# Altium PCB MAGI'sCore-MBH.PcbDoc
Units mil, origin at the board's own origin, x right, y up, seen from the top; angles counter-clockwise.
Board outline 6000 x 4000 mil, 2 copper layers (Top Layer, Bottom Layer); 12 components, 31 nets, 75 pads, 16 vias.
Unrouted connection lines stored in the file: 1.
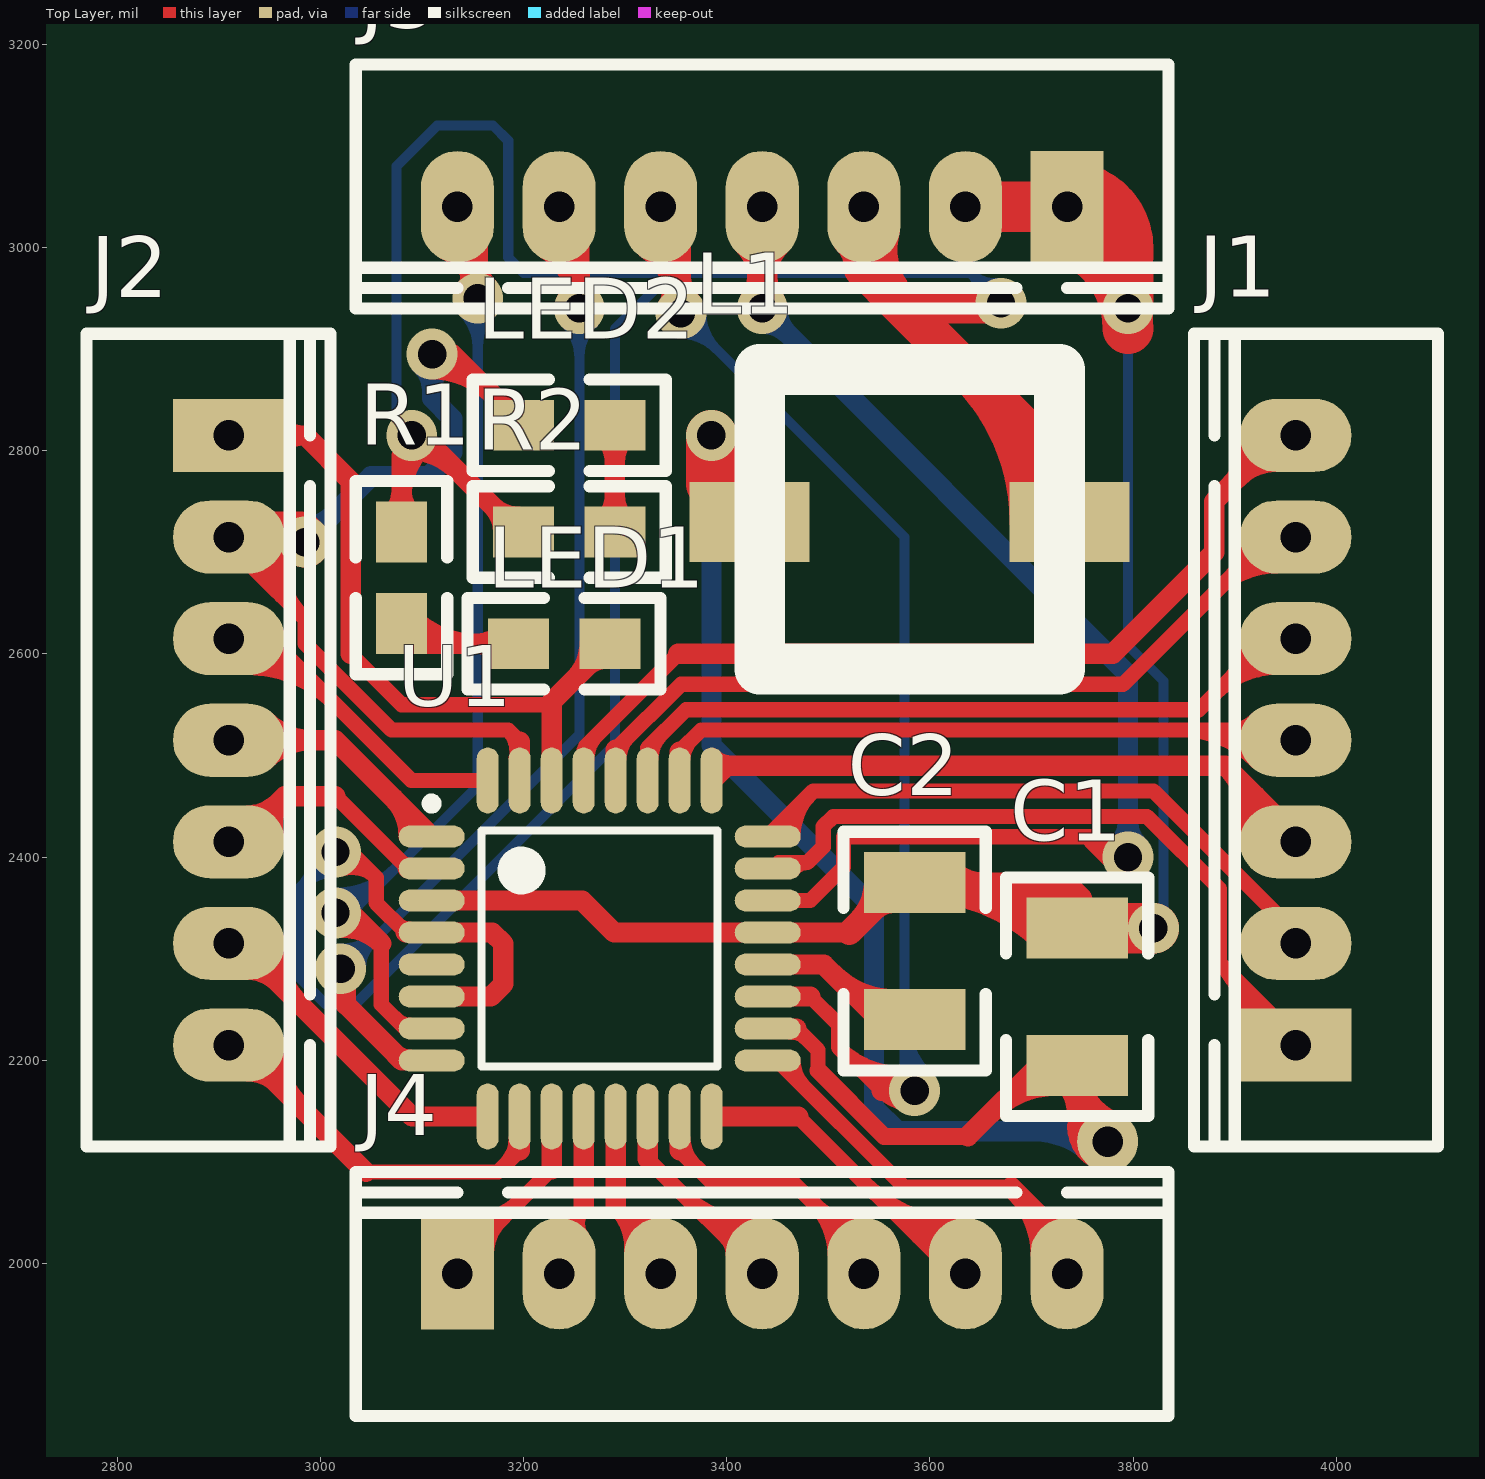
[diagram p0: Top Layer view]
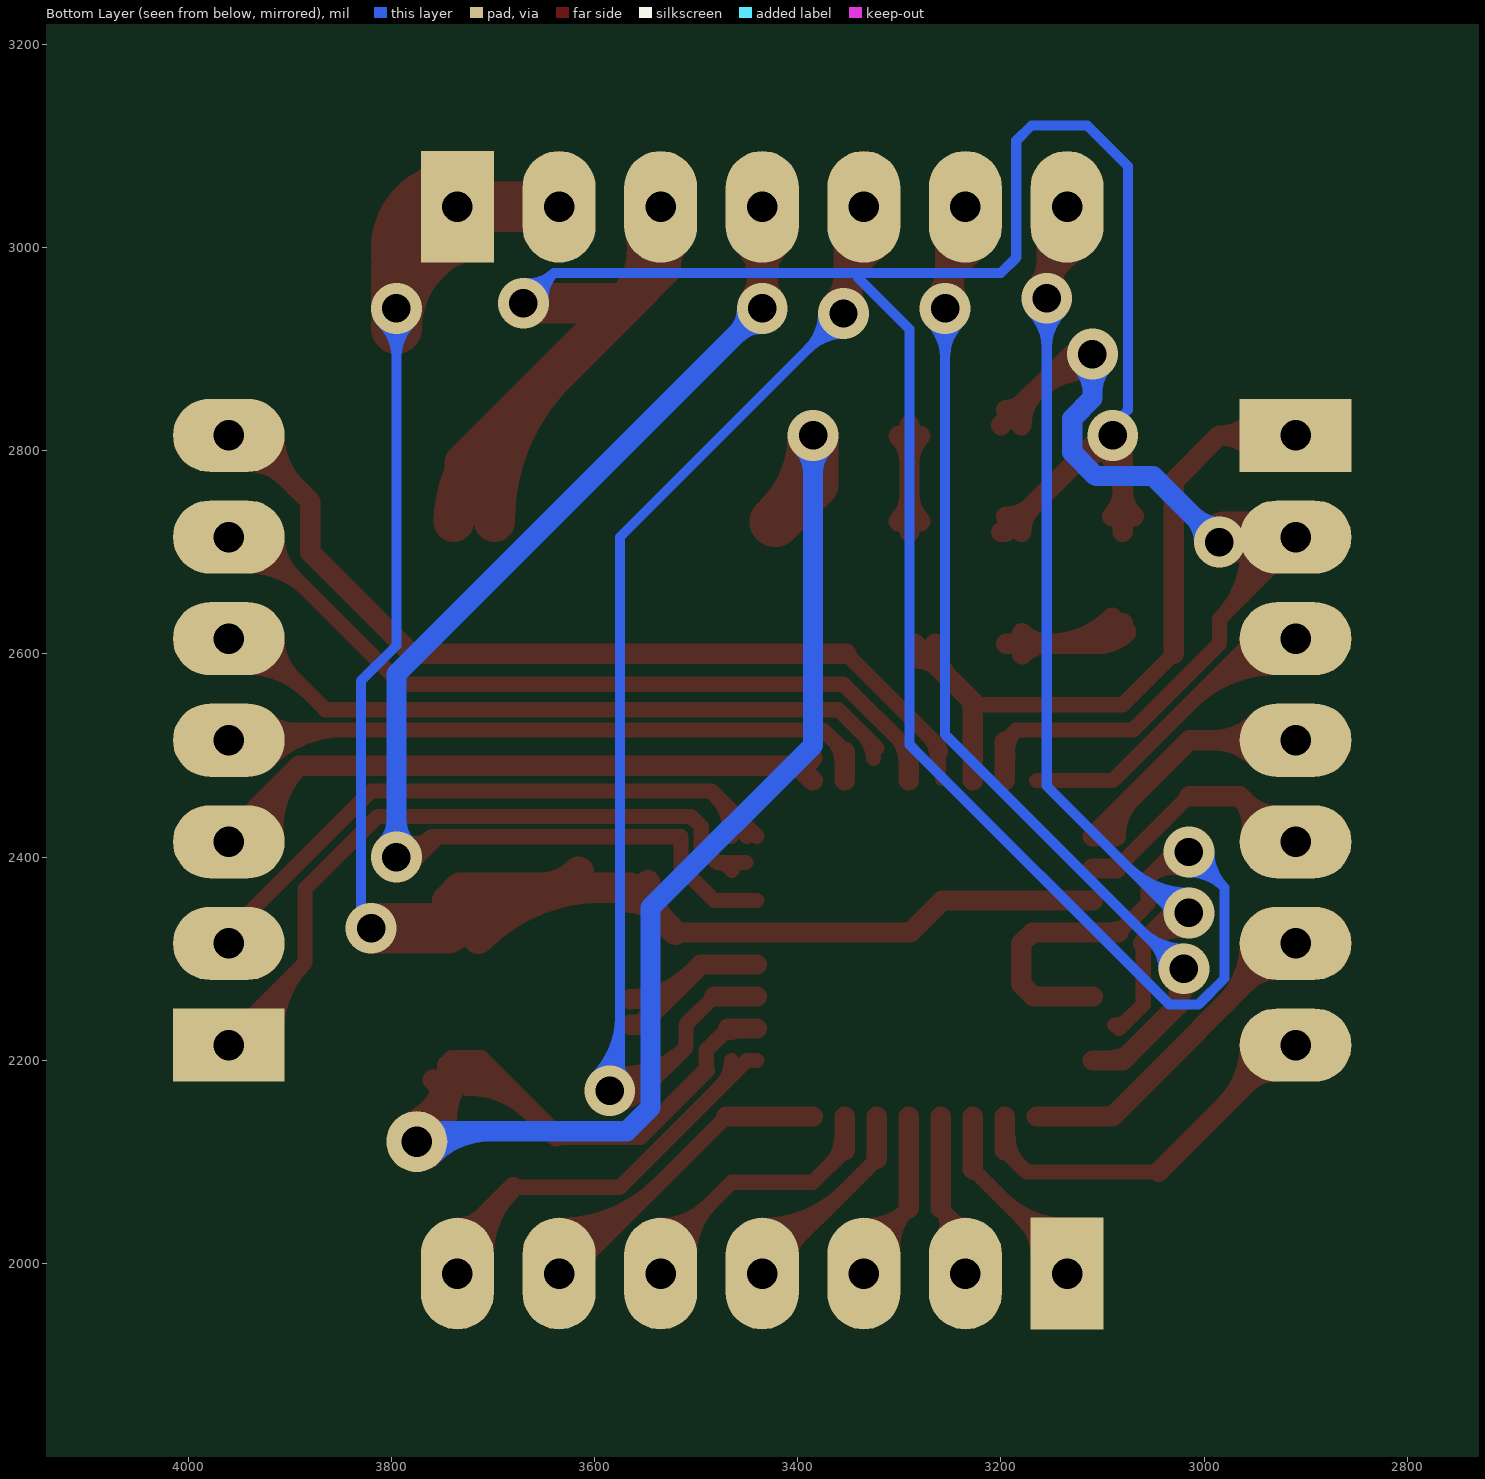
[diagram p1: Bottom Layer view, seen from below]

## Layer stack, top to bottom
Top Layer: signal copper 1.4
Dielectric: dielectric 12.6, FR-4, Dk 4.8
Bottom Layer: signal copper 1.4

## Board outline
1000,1000 7000,1000 7000,5000 1000,5000

## Design rules (kind name [scope] priority, off if disabled: settings)
Clearance [All] p1: gap=5
ComponentClearance [All] p1: gap=0 collisioncheckmode=3 verticalgap=0 showdistances=FALSE
PolygonConnect [All] p1: connectstyle=Relief reliefconductorwidth=10 reliefentries=4 polygonreliefangle="90 Angle" airgapwidth=10
RoutingVias [All] p1: holewidth=28 width=50 viastyle="Through Hole" minholewidth=28 minwidth=50 maxholewidth=28 maxwidth=50
SilkToSilkClearance [All] p1: silktosilkclearance=0
SolderMaskExpansion [All] p1: expansion=4
Width [All] p1: maxlimit=100 minlimit=10 preferedwidth=10
26 further rules are at their usual default settings.

## Components (designator, comment, footprint, x,y, rotation, side; value= is the part's Value field where it differs from the comment)
C1 "CAP_1" 1210 3745,2330 r270 top
C2 "CAP_1" 1210 3585,2375 r270 top
J1 "CON7" CON7 3960,2215 r90 top
J2 "CON7" CON7 2910,2815 r270 top
J3 "CON7" CON7 3735,3040 r180 top
J4 "CON7" CON7 3135,1990 r0 top
L1 "INDUCTOR" 22uh 3580,2730 r0 top
LED1 "LED_3" 0805 3195,2610 r0 top
LED2 "LED_3" 0805 3290,2825 r180 top
R1 "RES1_1" 0805 3080,2630 r90 top
R2 "RES1_1" 0805 3290,2720 r180 top
U1 "ATmega8A-AU" 32A_N 3275,2310 r0 top

## Footprints (in the part's own frame and the unit in brackets; to place one, negate y for a bottom-side part, rotate by r counter-clockwise, add the part's x,y. Pads: shape width x height; smd on the part's side, far side on the other; paste and mask are expansions set on the pad)
22uh [mm]
  rect 3x2 smd: 1(-4,0) 2(4,0)
  silkscreen extent -3.75,-3.68 3.75,3.81
32A_N [mm] "32-Pin Thin Quad Flat Pack 0.8 mm Pitch, IPC Medium Density"
  oval 1.65x0.55 smd: 1(-4.2,2.8) 2(-4.2,2) 3(-4.2,1.2) 4(-4.2,0.4) 5(-4.2,-0.4) 6(-4.2,-1.2) 7(-4.2,-2) 8(-4.2,-2.8) 17(4.2,-2.8) 18(4.2,-2) 19(4.2,-1.2) 20(4.2,-0.4) 21(4.2,0.4) 22(4.2,1.2) 23(4.2,2) 24(4.2,2.8)
  oval 0.55x1.65 smd: 9(-2.8,-4.2) 10(-2,-4.2) 11(-1.2,-4.2) 12(-0.4,-4.2) 13(0.4,-4.2) 14(1.2,-4.2) 15(2,-4.2) 16(2.8,-4.2) 25(2.8,4.2) 26(2,4.2) 27(1.2,4.2) 28(0.4,4.2) 29(-0.4,4.2) 30(-1.2,4.2) 31(-2,4.2) 32(-2.8,4.2)
  silkscreen extent -4.32,-2.95 2.95,3.75, body extent -3.5,-3.5 3.5,3.5, height 1.2
0805 [mil]
  rect 60x50 smd: 1(0,0) 2(90,0)
  silkscreen extent -50,-45 140,45
1210 [mil]
  rect 60x100 smd: 1(0,0) 2(135,0)
  silkscreen extent -50,-70 185,70
CON7 [mil]
  rect 72x110 hole 30: 1(0,0)
  oval 72x110 hole 30: 2(100,0) 3(200,0) 4(300,0) 5(400,0) 6(500,0) 7(600,0)
  silkscreen extent -100,-140 700,100

## Part data
C1 C2: "Capacitor"
J1 J2 J3 J4: "Connector"
U1: "8-bit AVR Microcontroller, 8KB Flash, 512 Bytes EEPROM, 1KB SRAM, 32-pin TQFP, Industrial Grade (-40癈 to 85癈)"

## Free pads (board coordinates)
  round 60 hole 30: 0(3775,2120)

## Via types
v1: diameter 50, hole 28, Top Layer to Bottom Layer, 16 vias

## Nets (pads, with @x,y where several pads share a name; then routed paths per layer and width w, separated by ;. In a path a pad name is that pad's centre, name@x,y a point inside that pad or via, vN(x,y) a via of type N, cw(c..) or ccw(c..) an arc to the next point about the centre after c; other vN are vias at no path point)
ADC6: J3.5 U1.19 | length 1852.5
  Top Layer w15: 3482.24,2262.76 3510,2235 3510,2212.72 ; 3531.9,2190.82 ccw(c3577.23,2236.16) v1@3584.71,2172.48 ; 3552.72,2170 3510,2212.72 ; 3553.79,2168.93 ccw(c3581.83,2196.97) v1@3586.46,2157.59 ; v1@3582.96,2187.38 cw(c3572.63,2275.35) 3510,2212.72
  Top Layer w20: J3.5@3320.1,2999.69 cw(c3273.27,2932.71) v1@3355,2932.71 ; J3.5@3331.56,3016.08 cw(c3300.11,2971.1) 3355,2971.1 ; v1@3342.01,2942.5 ccw(c3312.4,2959.59) 3345.42,2968.44 ; v1@3344.39,2945.61 ccw(c3318.79,2971.21) 3355,2971.21 ccw(c3391.21,2971.21) v1@3365.61,2945.61 ; 3344.68,2971.21 ccw(c3381.62,2981.11) v1@3362.5,2947.99 ; v1(3355,2935) J3.5@3355,3060 ; U1.19 3482.24,2262.76 ; v1@3565,2170 3552.72,2170 ; v1@3573.53,2160.33 ccw(c3552.72,2142.77) 3552.72,2170 ; v1@3573.53,2179.67 cw(c3552.72,2197.23) 3552.72,2170
  Bottom Layer w10: v1@3355,2915 cw(c3355,2866.72) 3389.14,2900.86 cw(c3423.28,2935) v1@3375,2935 ; v1(3355,2935) 3575,2715 v1@3575,2165 ; v1@3570.86,2184.14 ccw(c3560.86,2194.14) 3575,2194.14 ccw(c3609.14,2194.14) v1(3585,2170) ; 3575,2218.28 ccw(c3633.28,2218.28) v1@3592.07,2177.07 ; 3575,2242.43 ccw(c3657.43,2242.43) v1@3599.14,2184.14
ADC7: J3.4 U1.22 | length 1596.8
  Top Layer w15: U1.22 3482.24,2357.24 3515,2390 3515,2420 3760,2420 3761.25,2418.75
  Top Layer w20: J3.4@3416.62,3002.62 cw(c3372.23,2958.23) 3435,2958.23 cw(c3497.77,2958.23) J3.4@3453.38,3002.62 ; v1@3422.77,2948.68 ccw(c3390.62,2971.51) 3428.71,2981.72 ; v1@3424.39,2950.61 ccw(c3398.79,2976.21) 3435,2976.21 ccw(c3471.21,2976.21) v1@3445.61,2950.61 ; v1@3427.5,2952.99 ccw(c3417.45,2970.4) 3436.87,2965.2 ; 3433.13,2965.2 ccw(c3452.55,2970.4) v1@3442.5,2952.99 ; v1(3435,2940) J3.4 ; 3441.29,2981.72 ccw(c3479.38,2971.51) v1@3447.23,2948.68 ; v1@3788,2413.27 cw(c3776.87,2434.37) 3760,2417.5 3777.5,2400 v1(3795,2400)
  Bottom Layer w20: v1@3435,2925 cw(c3435,2888.79) 3460.61,2914.39 cw(c3486.21,2940) v1@3450,2940 ; v1(3435,2940) 3795,2580 v1(3795,2400) ; v1@3784.39,2410.61 ccw(c3758.79,2436.21) 3795,2436.21 ccw(c3831.21,2436.21) v1@3805.61,2410.61
GND: C1.1 C2.1 J3.1 J3.2 U1.3 U1.5 U1.21 | length 2550.8
  Top Layer w20: U1.3 3257.76,2357.24 3289.25,2325.75 U1.21 3520.75,2325.75
  Top Layer w25: 3520.75,2325.75 C2.1@3565,2370 ; 3531.59,2336.59 ccw(c3493.18,2375) C2.1@3547.5,2375 ; C2.1@3543.66,2348.66 cw(c3565,2327.32) C2.1@3565,2357.5
  Top Layer w30: C2.1@3565,2370 3732.5,2370 3745,2357.5 C1.1 ; C2.1@3592.22,2370 cw(c3592.22,2197.22) C1.1@3714.39,2319.39 ; C2.1@3615.61,2385.61 ccw(c3653.28,2423.28) 3653.28,2370 ; 3664.64,2370 cw(c3664.64,2269.64) C1.1@3735.61,2340.61
  Top Layer w50: J3.2 J3.1 3795,2980 v1(3795,2940) ccw(c3698.43,2940) J3.1@3766.72,3008.28 ; J3.1@3731.3,3010.64 cw(c3698.95,2920.2) v1@3795,2920.2 ; J3.1@3734.74,3010 cw(c3733.31,2948.33) v1@3795,2948.33 ; J3.1@3735,3010 cw(c3735,2937.57) 3786.21,2988.79 ; J3.1@3735.91,3059.99 cw(c3734.5,2999.51) 3795,2999.51 ; C1.1 v1(3820,2330) ; J3.1@3748.13,3057.72 cw(c3724.34,2991.19) 3795,2991.19
  Bottom Layer w10: v1@3780.86,2925.86 cw(c3746.72,2891.72) 3795,2891.72 cw(c3843.28,2891.72) v1@3809.14,2925.86 ; v1(3795,2940) 3795,2608.28 3830,2573.28 3830,2335 v1@3835,2330
MISO: J4.6 U1.16 | length 555.6
  Top Layer w15: 3470.35,2144.65 J4.6@3625,1990 ; 3536.84,2078.16 ccw(c3635,2176.32) J4.6@3635,2037.5 ; 3562.45,2052.55 ccw(c3635,2125.1) J4.6@3635,2022.5 ; 3588.05,2026.95 ccw(c3635,2073.89) J4.6@3635,2007.5
  Top Layer w20: U1.16 3470.35,2144.65 ; J4.6@3625,1990 J4.6
MOSI: J4.5 U1.15 | length 413.2
  Top Layer w15: 3353.74,2111.26 3385,2080 3465,2080 J4.5@3535,2010 ; U1.15@3357.07,2122.99 ccw(c3393.42,2122.99) 3367.72,2097.28 ; 3485.64,2059.36 cw(c3435.28,2009) J4.5@3506.5,2009 ; 3488.05,2056.95 ccw(c3535,2103.89) J4.5@3535,2037.5
  Top Layer w20: 3353.74,2111.26 U1.15 ; J4.5 J4.5@3535,2010
NetC1_2: C1.2 L1.1 pad.0 U1.18 | length 2282.3
  Top Layer w15: U1.18@3462.01,2227.93 cw(c3462.01,2203.65) 3479.18,2220.82 ; U1.18@3468.74,2231.26 3490,2210 3490,2190
  Top Layer w17: 3490,2190 3555,2125 3637.5,2125
  Top Layer w20: U1.18 U1.18@3468.74,2231.26 ; 3637.5,2125 3712.5,2200 C1.2@3740,2200 ; 3660.98,2148.48 cw(c3725,2084.47) C1.2@3725,2175 ; C1.2@3695.13,2182.63 cw(c3725,2152.75) C1.2@3725,2195 ; C1.2@3730.86,2180.86 cw(c3696.72,2146.72) 3745,2146.72 cw(c3793.28,2146.72) C1.2@3759.14,2180.86 ; C1.2@3741.35,2175.34 cw(c3738.59,2160.46) 3753.21,2164.38 cw(c3767.82,2168.29) C1.2@3757.99,2179.79 ; 3745,2135 ccw(c3781.25,2135) pad.0@3767.31,2101.54 ; 3745,2165 ccw(c3793.75,2165) pad.0 ; pad.0@3755,2120.31 ccw(c3720.85,2120.84) 3745,2145 ; pad.0@3765,2125 3745,2145 ; pad.0@3769.03,2139.09 cw(c3761.9,2161.9) 3745,2145 ; pad.0@3782.69,2138.46 cw(c3806.25,2195) C1.2 3745,2145
  Top Layer w50: v1@3385,2807.7 ccw(c3480.52,2807.7) L1.1@3412.98,2740.16 ; L1.1@3418.59,2733.91 cw(c3499.68,2815) v1(3385,2815) 3385,2767.5 L1.1
  Bottom Layer w20: v1@3374.39,2804.39 cw(c3348.79,2778.79) 3385,2778.79 cw(c3421.21,2778.79) v1@3395.61,2804.39 ; v1(3385,2815) 3385,2510 3545,2350 3545,2153.43 3568.43,2130 3765,2130 pad.0 ; 3702.57,2130 cw(c3702.57,2047.57) pad.0@3760.86,2105.86
NetC2_2: C2.2 U1.20 | length 215.6
  Top Layer w20: U1.20 3495.75,2294.25 3555,2235 C2.2@3565,2235 ; 3505.25,2284.75 ccw(c3565,2344.5) C2.2@3565,2260
NetJ1_1: J1.1 U1.23 | length 915.9
  Top Layer w15: U1.23@3451.02,2394.57 3479.57,2394.57 ; U1.23@3464.73,2386.84 cw(c3479.57,2376.48) 3479.57,2394.57 ; 3907.26,2273.68 cw(c3857.31,2223.73) J1.1@3927.57,2216.4 ; J1.1@3912.65,2217.96 ccw(c3816.99,2227.93) 3885,2295.94 ; 3929.52,2251.42 cw(c3897.62,2219.52) J1.1@3942.49,2214.84 ; J1.1@3975,2190 3975,2205.95 3885,2295.95 ; 3479.57,2394.57 3495,2410 3495,2430 3505,2440 3813.79,2440 3885,2368.79 3885,2295.95
NetJ1_2: J1.2 U1.24 | length 703.7
  Top Layer w15: U1.24 3485.12,2465 3820,2465 3975,2310 J1.2@3975,2290 ; U1.24@3450.33,2420.24 cw(c3474.43,2420.24) 3457.39,2437.27 ; U1.24@3465.33,2420.24 cw(c3525.64,2420.24) 3483,2462.88
NetJ1_3: J1.3 U1.25 | length 811.6
  Top Layer w20: U1.25 3399.88,2490 ; U1.25@3385.82,2497.59 ccw(c3404.15,2515.92) 3404.15,2490 ; U1.25@3385.92,2497.47 ccw(c3399.88,2506.78) 3399.88,2490 ; J1.3@3915.22,2418.41 ccw(c3830.56,2429.61) 3890.95,2490 ; 3919.6,2461.34 cw(c3881.18,2422.91) J1.3@3935.05,2415.79 ; J1.3@3975,2390 3975,2405.95 3890.95,2490 ; 3399.88,2490 3890.95,2490
NetJ1_4: J1.4 U1.26 | length 852.5
  Top Layer w15: U1.26@3353.74,2503.74 3375,2525 J1.4@3940,2525 ; U1.26@3357.07,2497.01 cw(c3381.35,2497.01) 3364.18,2514.18 ; 3848.05,2525 cw(c3848.05,2422.05) J1.4@3920.85,2494.85 ; 3884.27,2525 cw(c3884.27,2458.27) J1.4@3931.45,2505.45 ; 3896.34,2525 ccw(c3896.34,2559.66) J1.4@3920.85,2535.15
  Top Layer w20: U1.26 U1.26@3353.74,2503.74 ; J1.4@3940,2525 J1.4@3975,2490
NetJ1_5: J1.5 U1.27 | length 891.7
  Top Layer w15: U1.27@3322.24,2507.24 3360,2545 3865,2545 3910,2590 ; U1.27@3325.57,2497.01 cw(c3358.31,2497.01) 3335.16,2520.16 ; 3882.1,2562.1 cw(c3941,2503.21) J1.5@3941,2586.5 ; 3896.59,2576.59 ccw(c3858.18,2615) J1.5@3912.5,2615 ; 3907.71,2587.71 cw(c3941,2554.42) J1.5@3941,2601.5 ; J1.5@3913.89,2606.2 cw(c3898.72,2601.28) 3910,2590 ; J1.5@3924.99,2591.42 ccw(c3918.35,2581.65) 3910,2590
  Top Layer w20: 3910,2590 J1.5@3975,2590
NetJ1_6: J1.6 U1.28 | length 992.8
  Top Layer w15: U1.28@3290.75,2505.75 3355,2570 3790,2570 3910,2690 ; U1.28@3294.07,2497.01 cw(c3323.21,2497.01) 3302.61,2517.61 ; 3882.1,2662.1 cw(c3941,2603.21) J1.6@3941,2686.5 ; 3896.59,2676.59 ccw(c3858.18,2715) J1.6@3912.5,2715 ; 3907.71,2687.71 cw(c3941,2654.42) J1.6@3941,2701.5 ; J1.6@3913.89,2706.2 cw(c3898.72,2701.28) 3910,2690 ; J1.6@3924.99,2691.42 ccw(c3918.35,2681.65) 3910,2690
  Top Layer w20: U1.28 U1.28@3290.75,2505.75 ; 3910,2690 J1.6@3975,2690
NetJ2_3: J2.3 U1.32 | length 476.1
  Top Layer w15: J2.3@2929,2586.5 cw(c2929,2467) 3013.5,2551.5 ; J2.3@2929,2601.5 cw(c2929,2518.21) 2987.9,2577.1 ; J2.3@2950,2615 3089.65,2475.35 U1.32 ; J2.3@2957.5,2615 ccw(c2975.61,2615) 2962.8,2602.2
  Top Layer w20: J2.3@2920,2615 J2.3@2950,2615
NetJ2_4: J2.4 U1.1 | length 374.8
  Top Layer w20: J2.4@2920,2515 3014.88,2515 U1.1 ; J2.4@2947.38,2496.62 cw(c2991.77,2452.23) 2991.77,2515 cw(c2991.77,2577.77) J2.4@2947.38,2533.38 ; 3071.27,2458.61 cw(c3032.89,2420.24) U1.1@3087.17,2420.24 ; U1.1@3105.41,2424.47 cw(c3101.18,2420.24) U1.1@3107.17,2420.24
NetJ2_5: J2.5 U1.2 | length 321.7
  Top Layer w15: 3015,2460 U1.2@3086.26,2388.74 ; 3079.36,2395.64 ccw(c3087.99,2404.28) U1.2@3087.99,2392.07
  Top Layer w20: J2.5@2920,2415 2965,2460 ; J2.5@2929,2441 ccw(c2929,2482.04) 2958.02,2453.02 ; J2.5@2954.23,2421.26 cw(c2993.89,2431.11) 2965,2460 ; 3015,2460 2965,2460 ; U1.2@3086.26,2388.74 U1.2
NetJ2_6: J2.6 U1.9 | length 413.9
  Top Layer w20: J2.6@2920,2315 3090.35,2144.65 U1.9 ; J2.6@2929,2289 cw(c2929,2247.96) 2958.02,2276.98 ; J2.6@2955,2315 ccw(c3039.5,2315) 2979.75,2255.25
NetJ2_7: J2.7 U1.10 | length 497.4
  Top Layer w15: 3045,2090 3175,2090 3196.26,2111.26 ; 3182.28,2097.28 ccw(c3156.58,2122.99) U1.10@3192.93,2122.99
  Top Layer w20: J2.7@2920,2215 3045,2090 ; J2.7@2929,2189 cw(c2929,2147.96) 2958.02,2176.98 ; J2.7@2955,2215 ccw(c3039.5,2215) 2979.75,2155.25 ; 3196.26,2111.26 U1.10
NetJ4_1: J4.1 U1.11 | length 343.8
  Top Layer w15: J4.1@3135,2000 3227.76,2092.76 ; J4.1@3135,2022.5 ccw(c3135,2076.82) 3173.41,2038.41 ; J4.1@3135,2037.5 ccw(c3135,2128.03) 3199.02,2064.02 ; J4.1@3163.5,2009 cw(c3210.58,2009) 3177.29,2042.29
  Top Layer w20: J4.1 J4.1@3135,2000 ; 3227.76,2092.76 U1.11
NetJ4_2: J4.2 U1.12 | length 209.3
  Top Layer w15: J4.2 3235,2030 3259.25,2054.25 ccw(c3274.12,2039.38) J4.2@3257.51,2026.48 ; J4.2@3235,2037.5 ccw(c3235,2055.61) 3247.8,2042.8
  Top Layer w20: 3259.25,2054.25 U1.12
NetJ4_3: J4.3 U1.13 | length 267.8
  Top Layer w15: J4.3@3306.59,2011.26 ccw(c3252.1,2015.59) 3290.75,2054.25 ; J4.3@3333.8,2037.47 cw(c3331.37,2094.87) 3290.75,2054.25 ; J4.3 3335,2010 3290.75,2054.25
  Top Layer w20: 3290.75,2054.25 U1.13
NetJ4_4: J4.4 U1.14 | length 371.1
  Top Layer w15: 3322.24,2102.76 J4.4 ; 3353.91,2071.09 ccw(c3435,2152.18) J4.4@3435,2037.5 ; 3379.52,2045.48 ccw(c3435,2100.96) J4.4@3435,2022.5 ; 3399.78,2025.22 cw(c3383.57,2009) J4.4@3406.5,2009
  Top Layer w20: 3322.24,2102.76 U1.14
NetLED1_1: LED1.1 R1.1 | length 279.6
  Top Layer w20: R1.1@3076.46,2621.46 ccw(c3104.14,2649.14) R1.1@3104.14,2610 ; R1.1 3100,2610 LED1.1 ; R1.1@3090.61,2635.61 ccw(c3152.43,2697.43) 3152.43,2610 ; LED1.1@3179.39,2599.39 ccw(c3153.79,2573.79) 3153.79,2610 ccw(c3153.79,2646.21) LED1.1@3179.39,2620.61
NetLED2_1: LED2.1 R2.1 | length 218.8
  Top Layer w20: R2.1@3279.39,2730.61 ccw(c3253.79,2756.21) 3290,2756.21 ccw(c3326.21,2756.21) R2.1@3300.61,2730.61 ; LED2.1@3279.39,2814.39 cw(c3253.79,2788.79) 3290,2788.79 cw(c3326.21,2788.79) LED2.1@3300.61,2814.39 ; R2.1 LED2.1
PB6: J3.7 U1.7 | length 1407.4
  Top Layer w15: 3060,2315 3060,2255 U1.7@3083.74,2231.26 ; 3075.05,2239.95 ccw(c3087.99,2252.88) U1.7@3087.99,2234.59
  Top Layer w20: v1@3016.71,2330.1 cw(c3022.72,2277.73) 3060,2315 v1@3030,2345 ; J3.7@3123.56,2997.65 cw(c3098.86,2947.24) v1@3155,2947.24 ; J3.7@3132.36,3015.61 cw(c3114.58,2979.31) 3155,2979.31 ; v1@3143.46,2959.58 ccw(c3128.94,2971.62) 3147.16,2976.5 ccw(c3163.72,2980.94) v1@3159.07,2964.44 ; v1@3144.39,2960.61 ccw(c3118.79,2986.21) 3155,2986.21 ccw(c3191.21,2986.21) v1@3165.61,2960.61 ; v1(3155,2950) J3.7@3155,3060
  Bottom Layer w10: v1(3015,2345) ccw(c3015,2381.21) 3040.61,2355.61 ; v1@3015,2355 ccw(c3015,2415.36) 3057.68,2372.68 ; v1@3015,2365 ccw(c3015,2449.5) 3074.75,2389.75 ; v1@3030,2345 3155,2470 v1@3155,2965 ; v1@3035,2345 cw(c3047.07,2345) 3038.54,2353.54 ; v1@3140.86,2935.86 cw(c3106.72,2901.72) 3155,2901.72 cw(c3203.28,2901.72) v1@3169.14,2935.86
PB7: J3.6 U1.8 | length 1474.6
  Top Layer w20: v1@3012.27,2277.14 cw(c2998.75,2254.65) 3025,2254.65 ; v1@3035,2290 3025,2280 3025,2255 3038.81,2241.19 3066.43,2213.57 3080.24,2199.76 U1.8 ; 3073.34,2206.66 ccw(c3087.99,2221.31) U1.8@3087.99,2200.59 ; J3.6@3221.12,2999.01 cw(c3182.34,2937.57) v1@3255,2937.57 ; J3.6@3231.8,3015.93 cw(c3205.24,2973.84) 3255,2973.84 ; v1@3242.01,2947.5 ccw(c3212.51,2964.53) 3245.41,2973.35 ; v1@3244.39,2950.61 ccw(c3218.79,2976.21) 3255,2976.21 ccw(c3291.21,2976.21) v1@3265.61,2950.61 ; 3244.98,2974.95 ccw(c3278.88,2984.03) v1@3262.15,2953.19 ; v1(3255,2940) J3.6@3255,3060
  Bottom Layer w10: v1(3020,2290) 3024.5,2290 3255,2520.5 v1(3255,2940) ; v1@3020,2300 ccw(c3020,2335) 3044.75,2310.25 ; v1@3020,2310 ccw(c3020,2369.14) 3061.82,2327.32 ; v1@3040,2290 cw(c3077.43,2290) 3050.96,2316.46 ; v1@3240.86,2925.86 cw(c3206.72,2891.72) 3255,2891.72 cw(c3303.28,2891.72) v1@3269.14,2925.86
RST: J1.7 U1.29 | length 1025.8
  Top Layer w10: U1.29 U1.29@3259.25,2507.09
  Top Layer w15: U1.29@3261.77,2499.18 cw(c3267.79,2504.38) 3262.17,2510 3352.17,2600 ; U1.29@3262.58,2497.01 cw(c3294.94,2497.01) 3272.06,2519.89
  Top Layer w20: 3352.17,2600 3780,2600 3880,2700 3880,2750 3920,2790 J1.7@3975,2790 ; 3893.79,2763.79 ccw(c3842.57,2815) J1.7@3915,2815 ; 3903.44,2773.44 cw(c3941,2735.89) J1.7@3941,2789
RXD: J2.1 LED1.2 U1.30 | length 889.2
  Top Layer w15: 3030,2600 3080,2550 3227.76,2550
  Top Layer w20: J2.1@2920,2815 2985,2815 ; J2.1@2948.86,2798.22 cw(c2985,2767.7) 2985,2815 ; J2.1@2948.86,2831.78 ccw(c2985,2862.3) 2985,2815 ; 3030,2600 3030,2770 2985,2815 ; 3227.76,2550 U1.30 3227.76,2552.76 LED1.2 ; 3250.86,2575.86 ccw(c3216.72,2610) LED1.2@3265,2610 ; LED1.2@3262.93,2587.93 cw(c3280,2570.86) LED1.2@3280,2595
SCK: J4.7 U1.17 | length 526.5
  Top Layer w15: U1.17 3450.24,2199.76 3575,2075 3680,2075 ; U1.17@3450.33,2199.76 ccw(c3450.57,2199.76) U1.17@3450.4,2199.6 ; U1.17@3465.33,2199.76 ccw(c3501.78,2199.76) 3476.01,2173.99
  Top Layer w20: 3680,2075 3735,2020 J4.7 ; 3682.84,2072.16 cw(c3619.67,2009) J4.7@3709,2009 ; 3709.39,2045.61 ccw(c3735,2071.21) J4.7@3735,2035
TXD: J2.2 LED2.2 U1.31 | length 1354.6
  Top Layer w15: J2.2@2927.51,2715.16 ccw(c2972.38,2710.48) 2940.48,2678.58 ; J2.2@2932.03,2687.03 2985,2634.05 ; J2.2@2942.43,2713.6 ccw(c3012.69,2706.27) 2962.74,2656.32 ; J2.2@2957.35,2712.04 ccw(c3053.01,2702.07) 2985,2634.06 ; U1.31@3193.01,2497.72 ccw(c3164.03,2504.03) 3185,2525 ; 3196.26,2513.74 3185,2525 ; 2985,2634.05 2985,2610 3070,2525 3185,2525
  Top Layer w20: v1@3110,2880 cw(c3110,2795.5) 3169.75,2855.25 ; v1(3110,2895) 3130,2895 LED2.2 ; v1@3110,2900 cw(c3110,2863.79) 3135.61,2889.39 ; 3165.86,2859.14 cw(c3131.72,2825) LED2.2@3180,2825 ; LED2.2@3177.93,2847.07 ccw(c3195,2864.14) LED2.2@3195,2840 ; U1.31 3196.26,2513.74
  Top Layer w50: J2.2 2980,2715 v1(2985,2710)
  Bottom Layer w20: v1(2985,2710) 3050,2775 3106.57,2775 3130,2798.43 3130,2831.57 3110,2851.57 v1(3110,2895) ; v1@2985,2725 ccw(c2985,2761.21) 3010.61,2735.61 ccw(c3036.21,2710) v1@3000,2710 ; v1@3099.39,2884.39 cw(c3073.79,2858.79) 3110,2858.79 cw(c3146.21,2858.79) v1@3120.61,2884.39
VCC: J3.3 L1.2 R1.2 R2.2 U1.4 U1.6 | length 3979
  Top Layer w15: v1@3020.38,2388.35 cw(c3030.86,2355.87) 3055,2380 ; v1@3025,2410 3055,2380 ; 3075.93,2334.07 ccw(c3087.99,2346.14) U1.4@3087.99,2329.07 ; U1.4@3084.25,2325.75 3055,2355 3055,2380
  Top Layer w20: R1.2@3069.39,2735.61 ccw(c3043.79,2761.21) 3080,2761.21 ccw(c3116.21,2761.21) R1.2@3090.61,2735.61 ; R1.2 3080,2795 v1@3100,2815 ; 3080,2754.64 cw(c3150.36,2754.64) v1@3100.61,2804.39 ; U1.4@3084.25,2325.75 U1.4 3169.25,2325.75 3180,2315 3180,2275 3167.76,2262.76 U1.6 ; v1@3090,2800 cw(c3090,2739.64) 3132.68,2782.32 ; v1(3090,2815) 3090,2825 v1@3100,2815 ; R2.2@3180,2720 ccw(c3143.79,2720) 3169.39,2745.61 ccw(c3195,2771.21) R2.2@3195,2735 ; R2.2 3195,2720 v1@3100,2815
  Top Layer w40: J3.3@3523.69,3009.69 cw(c3496.37,2982.37) 3535,2982.37 cw(c3573.63,2982.37) J3.3@3546.31,3009.69 ; J3.3 3535,2980 3570,2945 ; J3.3@3550.48,3016.95 ccw(c3623,2998) 3570,2945 ; 3637.24,2877.76 cw(c3489.48,2730) L1.2@3698.44,2730 ; v1(3670,2945) 3570,2945 ; 3705.53,2809.47 cw(c3626.05,2730) L1.2@3738.44,2730 ; L1.2@3706.33,2745.59 ccw(c3675.45,2787.5) 3727.5,2787.5 ; L1.2@3727.5,2745 3727.5,2787.5 ; 3570,2945 3727.5,2787.5
  Bottom Layer w10: v1@2995,2405 cw(c2946.72,2405) 2980.86,2370.86 cw(c3015,2336.72) v1@3015,2385 ; v1(3015,2405) 2980,2370 2980,2280.5 3005.5,2255 3034.5,2255 3290,2510.5 3290,2919.5 3340.5,2970 ; v1(3090,2815) 3090,2825 3075,2840 3075,3080 3115,3120 3170,3120 3185,3105 3185,2990 3200,2975 3640,2975 ; v1@3650.09,2946.91 ccw(c3615.26,2950.25) 3640,2975 ; v1@3668.09,2964.91 cw(c3664.75,2999.74) 3640,2975 ; v1(3670,2945) 3640,2975